# Altium PCB temperatureSensor.PcbDoc (part 2 of 3)
Units mm, origin at the board's own origin, x right, y up, seen from the top; angles counter-clockwise.
Board outline 80 x 46 mm, 2 copper layers (Top Layer, Bottom Layer); 50 components, 32 nets, 187 pads, 128 vias.
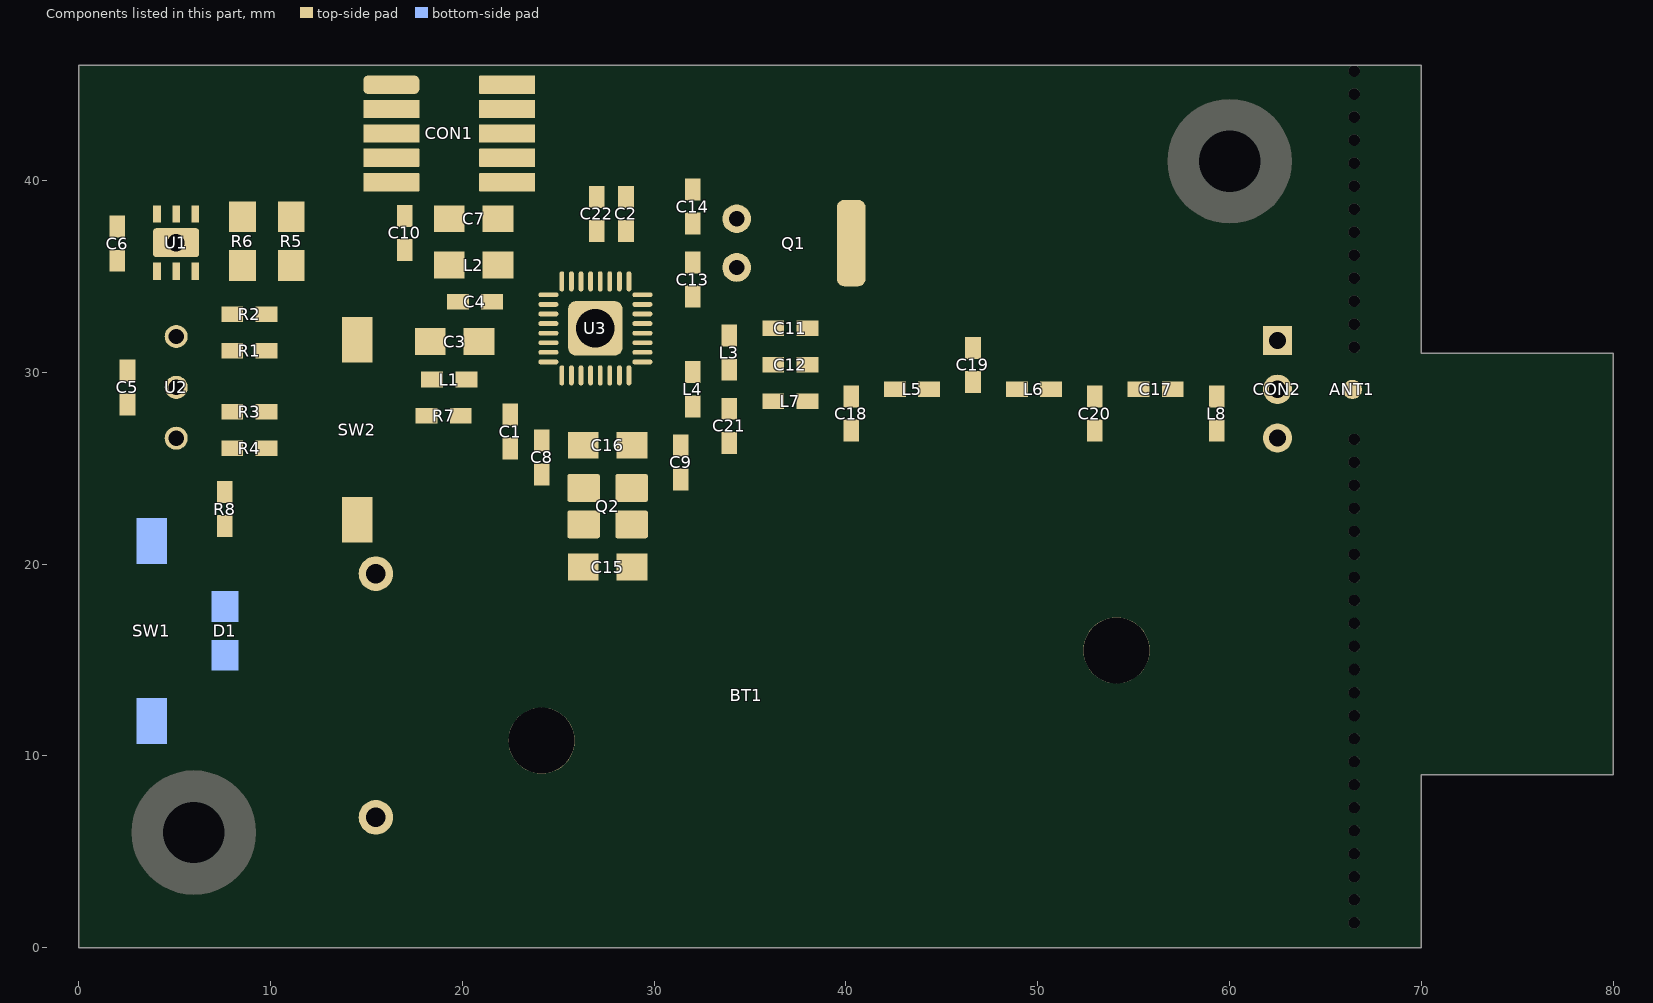
[diagram p2: the components of this part, seen from the top]

## Via types
v1: diameter 0.7, hole 0.3, Top Layer to Bottom Layer, tented both sides, 109 vias
v2: diameter 1, hole 0.38, Top Layer to Bottom Layer, tented both sides, 19 vias

## Nets (pads, with @x,y where several pads share a name; then routed paths per layer and width w, separated by ;. In a path a pad name is that pad's centre, name@x,y a point inside that pad or via, vN(x,y) a via of type N, cw(c..) or ccw(c..) an arc to the next point about the centre after c; other vN are vias at no path point) (continued)
copper on no net: (continued)
  Top Layer w0.025: 28.392,9.805 29.459,9.805 ; 28.392,9.831 29.459,9.831 ; 28.392,9.856 29.459,9.856 ; 28.392,9.881 29.459,9.881 ; 28.392,9.907 29.459,9.907 ; 28.392,9.932 29.459,9.932 ; 28.392,9.958 29.459,9.958 ; 28.392,9.983 29.459,9.983 ; 28.392,10.008 29.459,10.008 ; 28.392,10.034 29.459,10.034 ; 28.392,10.059 29.459,10.059 ; 28.392,10.085 29.459,10.085 ; 28.392,10.11 29.459,10.11 ; 28.392,10.135 29.459,10.135 ; 28.392,10.161 29.459,10.161 ; 28.392,10.186 29.459,10.186 ; 28.392,10.212 29.459,10.212 ; 28.392,10.237 29.459,10.237 ; 28.392,10.262 29.459,10.262 ; 28.392,10.288 29.459,10.288 ; 28.392,10.313 29.459,10.313 ; 28.392,10.339 29.459,10.339 ; 28.392,10.364 29.459,10.364 ; 28.392,10.389 29.459,10.389 ; 28.392,10.415 29.459,10.415 ; 28.392,10.44 29.459,10.44 ; 28.392,10.466 29.459,10.466 ; 28.392,10.491 29.459,10.491 ; 28.392,10.516 29.459,10.516 ; 28.392,10.542 29.459,10.542 ; 28.392,10.567 29.459,10.567 ; 28.392,10.593 29.459,10.593 ; 28.392,10.618 29.459,10.618 ; 28.392,10.643 29.459,10.643 ; 28.392,10.669 29.459,10.669 ; 28.392,10.694 29.459,10.694 ; 28.392,10.72 29.459,10.72 ; 28.392,10.745 29.459,10.745 ; 28.392,10.77 29.459,10.77 ; 28.392,10.796 29.459,10.796 ; 28.392,10.821 29.459,10.821 ; 28.392,10.847 29.459,10.847 ; 28.392,10.872 29.459,10.872 ; 28.392,10.897 29.459,10.897 ; 28.392,10.923 29.459,10.923 ; 28.392,10.948 29.459,10.948 ; 28.392,10.974 29.459,10.974 ; 28.392,10.999 29.459,10.999 ; 28.392,11.024 29.459,11.024 ; 28.392,11.05 29.459,11.05 ; 28.392,11.075 29.459,11.075 ; 28.392,11.101 29.459,11.101 ; 28.392,11.126 29.459,11.126 ; 28.392,11.151 29.459,11.151 ; 28.392,11.177 29.459,11.177 ; 28.392,11.202 29.459,11.202 ; 28.392,11.228 29.459,11.228 ; 28.392,11.253 29.459,11.253 ; 28.392,11.278 29.459,11.278 ; 28.392,11.304 29.459,11.304 ; 28.392,11.329 29.459,11.329 ; 28.392,11.355 29.434,11.355 ; 28.392,11.38 30.678,11.38 ; 28.392,11.405 30.653,11.405 ; 28.392,11.431 30.628,11.431 ; 28.392,11.456 30.602,11.456 ; 28.392,11.482 30.577,11.482 ; 28.392,11.507 30.551,11.507 ; 28.392,11.532 30.526,11.532 ; 28.392,11.558 30.526,11.558 ; 28.392,11.583 30.475,11.583 ; 28.392,11.609 30.45,11.609 ; 28.392,11.634 30.45,11.634 ; 28.392,11.659 30.424,11.659 ; 28.392,11.685 30.399,11.685 ; 28.392,11.71 30.374,11.71 ; 28.392,11.736 30.348,11.736 ; 28.392,11.761 30.348,11.761 ; 28.392,11.786 30.374,11.786 ; 28.392,11.812 30.399,11.812 ; 28.392,11.837 30.424,11.837 ; 28.392,11.863 30.45,11.863 ; 28.392,11.888 30.475,11.888 ; 28.392,11.913 30.501,11.913 ; 28.392,11.939 30.526,11.939 ; 28.392,11.964 30.577,11.964 ; 28.392,11.99 30.602,11.99 ; 28.392,12.015 30.628,12.015 ; 28.392,12.04 30.653,12.04 ; 28.392,12.066 30.678,12.066 ; 28.392,12.091 30.704,12.091 ; 28.392,12.117 30.729,12.117 ; 28.392,12.142 30.755,12.142 ; 28.392,12.167 30.78,12.167 ; 28.392,12.193 30.831,12.193 ; 28.392,12.218 29.459,12.218 ; 28.392,12.244 29.459,12.244 ; 28.392,12.269 29.459,12.269 ; 28.392,12.294 29.459,12.294 ; 28.392,12.32 29.459,12.32 ; 28.392,12.345 29.459,12.345 ; 28.392,12.371 29.459,12.371 ; 28.392,12.396 29.459,12.396 ; 28.392,12.421 29.459,12.421 ; 28.392,12.447 29.459,12.447 ; 28.392,12.472 29.459,12.472 ; 28.392,12.498 29.459,12.498 ; 28.392,12.523 29.459,12.523 ; 28.392,12.548 29.459,12.548 ; 28.392,12.574 29.459,12.574 ; 28.392,12.599 29.459,12.599 ; 28.392,12.625 29.459,12.625 ; 28.392,12.65 29.459,12.65 ; 28.392,12.675 29.459,12.675 ; 28.392,12.701 29.459,12.701 ; 28.392,12.726 29.459,12.726 ; 28.392,12.752 29.459,12.752 ; 28.392,12.777 29.459,12.777 ; 28.392,12.802 29.459,12.802 ; 28.392,12.828 29.459,12.828 ; 28.392,12.853 29.459,12.853 ; 28.392,12.879 29.459,12.879 ; 28.392,12.904 29.459,12.904 ; 28.392,12.929 29.459,12.929 ; 28.392,12.955 29.459,12.955 ; 28.392,12.98 29.459,12.98 ; 28.392,13.006 29.459,13.006 ; 28.392,13.031 29.459,13.031 ; 28.392,13.056 29.459,13.056 ; 28.392,13.082 29.459,13.082 ; 28.392,13.107 29.459,13.107 ; 28.392,13.133 29.459,13.133 ; 28.392,13.158 29.459,13.158 ; 28.392,13.183 29.459,13.183 ; 28.392,13.209 29.459,13.209 ; 28.392,13.234 29.459,13.234 ; 28.392,13.26 29.459,13.26 ; 28.392,13.285 29.459,13.285 ; 28.392,13.31 29.459,13.31 ; 28.392,13.336 29.459,13.336 ; 28.392,13.361 29.459,13.361 ; 28.392,13.387 29.459,13.387 ; 28.392,13.412 29.459,13.412 ; 28.392,13.437 29.459,13.437 ; 28.392,13.463 29.459,13.463 ; 28.392,13.488 29.459,13.488 ; 28.392,13.514 29.459,13.514 ; 28.392,13.539 29.459,13.539 ; 28.392,13.564 29.459,13.564 ; 28.392,13.59 29.459,13.59 ; 28.392,13.615 29.459,13.615 ; 28.392,13.641 29.459,13.641 ; 28.392,13.666 29.459,13.666 ; 28.392,13.691 29.459,13.691 ; 28.392,13.717 29.459,13.717 ; 28.392,13.742 29.459,13.742 ; 28.392,13.768 29.459,13.768 ; 28.392,13.793 29.459,13.793 ; 28.392,13.818 29.459,13.818 ; 28.392,13.844 29.459,13.844 ; 28.392,13.869 29.459,13.869 ; 28.392,13.895 29.459,13.895 ; 28.392,13.92 29.459,13.92 ; 28.392,13.945 29.459,13.945 ; 28.392,13.971 29.459,13.971 ; 28.392,13.996 29.459,13.996 ; 28.392,14.022 29.459,14.022 ; 28.392,14.047 29.459,14.047 ; 28.392,14.072 29.459,14.072 ; 28.392,14.098 29.459,14.098 ; 28.392,14.123 29.459,14.123 ; 28.392,14.149 29.459,14.149 ; 28.392,14.174 29.459,14.174 ; 28.392,14.199 29.459,14.199 ; 28.392,14.225 29.459,14.225 ; 28.392,14.25 29.459,14.25 ; 28.392,14.276 29.459,14.276 ; 28.392,14.301 29.459,14.301 ; 28.392,14.326 29.459,14.326 ; 28.392,14.352 29.459,14.352 ; 28.392,14.377 29.459,14.377 ; 28.392,14.403 29.459,14.403 ; 28.392,14.428 29.459,14.428 ; 28.392,14.453 29.459,14.453 ; 28.392,14.479 29.459,14.479 ; 28.392,14.504 29.459,14.504 ; 28.392,14.53 29.459,14.53 ; 28.392,14.555 29.434,14.555 ; 28.392,14.58 29.434,14.58 ; 28.392,14.606 29.434,14.606 ; 28.392,14.631 29.408,14.631 ; 28.392,14.657 29.408,14.657 ; 28.392,14.682 29.383,14.682 ; 28.392,14.707 29.383,14.707 ; 28.392,14.733 29.332,14.733 ; 28.392,14.758 29.332,14.758 ; 28.392,14.784 29.307,14.784 ; 28.392,14.809 29.281,14.809 ; 28.392,14.834 29.256,14.834 ; 28.392,14.86 29.231,14.86 ; 28.392,14.885 29.18,14.885 ; 28.392,14.911 29.129,14.911 ; 28.392,14.936 29.078,14.936 ; 28.392,14.961 28.951,14.961 ; 28.418,9.704 29.459,9.704 ; 28.418,9.729 29.459,9.729 ; 28.418,9.754 29.459,9.754 ; 28.418,9.78 29.459,9.78 ; 28.443,9.627 29.459,9.627 ; 28.443,9.653 29.459,9.653 ; 28.443,9.678 29.459,9.678 ; 28.469,9.577 29.459,9.577 ; 28.469,9.602 29.459,9.602 ; 28.494,9.551 29.459,9.551 ; 28.519,9.5 29.459,9.5 ; 28.519,9.526 29.459,9.526 ; 28.545,9.475 29.459,9.475 ; 28.57,9.45 29.459,9.45 ; 28.596,9.424 29.459,9.424 ; 28.646,9.399 29.459,9.399 ; 28.697,9.373 29.459,9.373 ; 28.748,9.348 29.459,9.348 ; 28.85,9.323 29.459,9.323 ; 29.459,11.355 30.704,11.355 ; 29.485,11.329 30.729,11.329 ; 29.51,11.278 30.755,11.278 ; 29.51,11.304 30.755,11.304 ; 29.51,12.218 30.856,12.218 ; 29.535,11.253 30.78,11.253 ; 29.535,12.244 30.882,12.244 ; 29.561,11.228 30.805,11.228 ; 29.561,12.269 30.907,12.269 ; 29.586,11.202 30.831,11.202 ; 29.586,12.294 30.932,12.294 ; 29.612,11.177 30.856,11.177 ; 29.612,12.32 30.958,12.32 ; 29.637,11.151 30.882,11.151 ; 29.662,11.101 30.932,11.101 ; 29.662,11.126 30.907,11.126 ; 29.662,12.345 30.983,12.345 ; 29.662,12.371 31.034,12.371 ; 29.688,11.075 30.958,11.075 ; 29.713,11.05 30.983,11.05 ; 29.713,12.396 31.059,12.396 ; 29.739,11.024 31.009,11.024 ; 29.739,12.421 31.085,12.421 ; 29.764,10.999 31.034,10.999 ; 29.764,12.447 31.11,12.447 ; 29.789,10.974 31.059,10.974 ; 29.789,12.472 31.136,12.472 ; 29.815,10.948 31.085,10.948 ; 29.815,12.498 31.161,12.498 ; 29.84,10.923 31.11,10.923 ; 29.84,12.523 31.186,12.523 ; 29.866,10.872 31.161,10.872 ; 29.866,10.897 31.136,10.897 ; 29.891,10.847 31.161,10.847 ; 29.891,12.548 31.212,12.548 ; 29.916,10.821 31.186,10.821 ; 29.916,12.574 31.263,12.574 ; 29.942,10.796 31.212,10.796 ; 29.942,12.599 31.263,12.599 ; 29.967,10.77 31.237,10.77 ; 29.967,12.625 31.313,12.625 ; 29.993,10.72 31.288,10.72 ; 29.993,10.745 31.263,10.745 ; 30.018,10.694 31.313,10.694 ; 30.018,12.65 31.339,12.65 ; 30.018,12.675 31.364,12.675 ; 30.043,10.669 31.339,10.669 ; 30.069,10.643 31.364,10.643 ; 30.069,12.701 31.39,12.701 ; 30.094,10.618 31.39,10.618 ; 30.094,12.726 31.415,12.726 ; 30.12,10.593 31.415,10.593 ; 30.12,12.752 31.44,12.752 ; 30.145,10.542 31.44,10.542 ; 30.145,10.567 31.415,10.567 ; 30.145,12.777 31.466,12.777 ; 30.17,10.516 31.466,10.516 ; 30.196,10.491 31.491,10.491 ; 30.196,12.802 31.517,12.802 ; 30.221,10.466 31.517,10.466 ; 30.221,12.828 31.542,12.828 ; 30.247,10.44 31.542,10.44 ; 30.247,12.853 31.567,12.853 ; 30.272,10.415 31.567,10.415 ; 30.272,12.879 31.593,12.879 ; 30.297,10.389 31.593,10.389 ; 30.297,12.904 31.618,12.904 ; 30.323,10.339 31.644,10.339 ; 30.323,10.364 31.618,10.364 ; 30.323,12.929 31.644,12.929 ; 30.348,10.313 31.669,10.313 ; 30.374,10.288 31.694,10.288 ; 30.374,12.955 31.669,12.955 ; 30.399,10.262 31.72,10.262 ; 30.399,12.98 31.694,12.98 ; 30.424,10.212 31.745,10.212 ; 30.424,10.237 31.72,10.237 ; 30.424,13.006 31.745,13.006 ; 30.45,10.186 31.796,10.186 ; 30.45,13.031 31.771,13.031 ; 30.475,10.161 31.796,10.161 ; 30.475,13.056 31.796,13.056 ; 30.501,10.135 31.821,10.135 ; 30.501,13.082 31.821,13.082 ; 30.526,10.085 31.872,10.085 ; 30.526,10.11 31.847,10.11 ; 30.526,13.107 31.847,13.107 ; 30.551,10.059 31.898,10.059 ; 30.577,10.034 31.923,10.034 ; 30.577,13.133 31.872,13.133 ; 30.602,10.008 31.948,10.008 ; 30.602,13.158 31.898,13.158 ; 30.628,9.983 31.974,9.983 ; 30.628,13.183 31.923,13.183 ; 30.653,9.932 32.025,9.932 ; 30.653,9.958 31.999,9.958 ; 30.653,13.209 31.948,13.209 ; 30.678,9.907 32.025,9.907 ; 30.678,13.234 31.999,13.234 ; 30.704,9.881 32.05,9.881 ; 30.704,13.26 32.025,13.26 ; 30.729,9.856 32.101,9.856 ; 30.729,13.285 32.05,13.285 ; 30.755,9.831 32.126,9.831 ; 30.755,13.31 32.075,13.31 ; 30.78,9.805 32.126,9.805 ; 30.805,9.78 32.152,9.78 ; 30.805,13.336 32.101,13.336 ; 30.831,9.754 32.177,9.754 ; 30.831,13.361 32.126,13.361 ; 30.856,9.729 32.202,9.729 ; 30.882,9.704 32.228,9.704 ; 30.882,13.387 32.152,13.387 ; 30.907,9.678 32.253,9.678 ; 30.907,13.412 32.177,13.412 ; 30.932,9.653 32.279,9.653 ; 30.958,9.627 32.304,9.627 ; 30.958,13.437 32.228,13.437 ; 30.983,9.602 32.304,9.602 ; 30.983,13.463 32.253,13.463 ; 31.009,9.577 32.304,9.577 ; 31.034,13.488 32.253,13.488 ; 31.059,9.551 32.304,9.551 ; 31.085,9.526 32.279,9.526 ; 31.085,13.514 32.202,13.514 ; 31.11,9.5 32.279,9.5 ; 31.136,13.539 32.152,13.539 ; 31.161,9.475 32.228,9.475 ; 31.186,9.45 32.202,9.45 ; 31.212,13.564 32.101,13.564 ; 31.237,9.424 32.177,9.424 ; 31.288,9.399 32.152,9.399 ; 31.288,13.59 32.05,13.59 ; 31.339,9.373 32.101,9.373 ; 31.39,9.348 32.05,9.348 ; 31.39,13.615 31.974,13.615 ; 31.491,9.323 31.948,9.323 ; 31.517,13.641 31.847,13.641 ; 32.38,9.323 33.218,9.323 ; 32.38,9.348 33.218,9.348 ; 32.38,9.373 33.218,9.373 ; 32.38,9.399 33.218,9.399 ; 32.38,9.424 33.218,9.424 ; 32.38,9.45 33.218,9.45 ; 32.38,9.475 33.218,9.475 ; 32.38,9.5 33.218,9.5 ; 32.38,9.526 33.218,9.526 ; 32.38,9.551 33.218,9.551 ; 32.38,9.577 33.218,9.577 ; 32.38,9.602 33.218,9.602 ; 32.38,9.627 33.218,9.627 ; 32.38,9.653 33.218,9.653 ; 32.38,9.678 33.218,9.678 ; 32.38,9.704 33.218,9.704 ; 32.38,9.729 33.218,9.729 ; 32.38,9.754 33.218,9.754 ; 32.38,9.78 33.218,9.78 ; 32.38,9.805 33.218,9.805 ; 32.38,9.831 33.218,9.831 ; 32.38,9.856 33.218,9.856 ; 32.38,9.881 33.218,9.881 ; 32.38,9.907 33.218,9.907 ; 32.38,9.932 33.218,9.932 ; 32.38,9.958 33.218,9.958 ; 32.38,9.983 33.218,9.983 ; 32.38,10.008 33.218,10.008 ; 32.38,10.034 33.218,10.034 ; 32.38,10.059 33.218,10.059 ; 32.38,10.085 33.218,10.085 ; 32.38,10.11 33.218,10.11 ; 32.38,10.135 33.218,10.135 ; 32.38,10.161 33.218,10.161 ; 32.38,10.186 33.218,10.186 ; 32.38,10.212 33.218,10.212 ; 32.38,10.237 33.218,10.237 ; 32.38,10.262 33.218,10.262 ; 32.38,10.288 33.218,10.288 ; 32.38,10.313 33.218,10.313 ; 32.38,10.339 33.218,10.339 ; 32.38,10.364 33.218,10.364 ; 32.38,10.389 33.218,10.389 ; 32.38,10.415 33.218,10.415 ; 32.38,10.44 33.218,10.44 ; 32.38,10.466 33.218,10.466 ; 32.38,10.491 33.218,10.491 ; 32.38,10.516 33.218,10.516 ; 32.38,10.542 33.218,10.542 ; 32.38,10.567 33.218,10.567 ; 32.38,10.593 33.218,10.593 ; 32.38,10.618 33.218,10.618 ; 32.38,10.643 33.218,10.643 ; 32.38,10.669 33.218,10.669 ; 32.38,10.694 33.218,10.694 ; 32.38,10.72 33.218,10.72 ; 32.38,10.745 33.218,10.745 ; 32.38,10.77 33.218,10.77 ; 32.38,10.796 33.218,10.796 ; 32.38,10.821 33.218,10.821 ; 32.38,10.847 33.218,10.847 ; 32.38,10.872 33.218,10.872 ; 32.38,10.897 33.218,10.897 ; 32.38,10.923 33.218,10.923 ; 32.38,10.948 33.218,10.948 ; 32.38,10.974 33.218,10.974 ; 32.38,10.999 33.218,10.999 ; 32.38,11.024 33.218,11.024 ; 32.38,11.05 33.193,11.05 ; 32.38,11.075 36.724,11.075 ; 32.38,11.101 36.724,11.101 ; 32.38,11.126 36.724,11.126 ; 32.38,11.151 36.724,11.151 ; 32.38,11.177 36.724,11.177 ; 32.38,11.202 36.724,11.202 ; 32.38,11.228 36.724,11.228 ; 32.38,11.253 36.724,11.253 ; 32.38,11.278 36.724,11.278 ; 32.38,11.304 36.724,11.304 ; 32.38,11.329 36.724,11.329 ; 32.38,11.355 36.724,11.355 ; 32.38,11.38 36.724,11.38 ; 32.38,11.405 36.724,11.405 ; 32.38,11.431 36.724,11.431 ; 32.38,11.456 36.724,11.456 ; 32.38,11.482 36.724,11.482 ; 32.38,11.507 36.724,11.507 ; 32.38,11.532 36.724,11.532 ; 32.38,11.558 36.724,11.558 ; 32.38,11.583 36.724,11.583 ; 32.38,11.609 36.724,11.609 ; 32.38,11.634 36.724,11.634 ; 32.38,11.659 36.724,11.659 ; 32.38,11.685 36.724,11.685 ; 32.38,11.71 36.724,11.71 ; 32.38,11.736 36.724,11.736 ; 32.38,11.761 36.724,11.761 ; 32.38,11.786 36.724,11.786 ; 32.38,11.812 36.724,11.812 ; 32.38,11.837 36.724,11.837 ; 32.38,11.863 36.724,11.863 ; 32.38,11.888 36.724,11.888 ; 32.38,11.913 33.218,11.913 ; 32.38,11.939 33.218,11.939 ; 32.38,11.964 33.218,11.964 ; 32.38,11.99 33.218,11.99 ; 32.38,12.015 33.218,12.015 ; 32.38,12.04 33.218,12.04 ; 32.38,12.066 33.218,12.066 ; 32.38,12.091 33.218,12.091 ; 32.38,12.117 33.218,12.117 ; 32.38,12.142 33.218,12.142 ; 32.38,12.167 33.218,12.167 ; 32.38,12.193 33.218,12.193 ; 32.38,12.218 33.218,12.218 ; 32.38,12.244 33.218,12.244 ; 32.38,12.269 33.218,12.269 ; 32.38,12.294 33.218,12.294 ; 32.38,12.32 33.218,12.32 ; 32.38,12.345 33.218,12.345 ; 32.38,12.371 33.218,12.371 ; 32.38,12.396 33.218,12.396 ; 32.38,12.421 33.218,12.421 ; 32.38,12.447 33.218,12.447 ; 32.38,12.472 33.218,12.472 ; 32.38,12.498 33.218,12.498 ; 32.38,12.523 33.218,12.523 ; 32.38,12.548 33.218,12.548 ; 32.38,12.574 33.218,12.574 ; 32.38,12.599 33.218,12.599 ; 32.38,12.625 33.218,12.625 ; 32.38,12.65 33.218,12.65 ; 32.38,12.675 33.218,12.675 ; 32.38,12.701 33.218,12.701 ; 32.38,12.726 33.218,12.726 ; 32.38,12.752 33.218,12.752 ; 32.38,12.777 33.218,12.777 ; 32.38,12.802 33.218,12.802 ; 32.38,12.828 33.218,12.828 ; 32.38,12.853 33.218,12.853 ; 32.38,12.879 33.218,12.879 ; 32.38,12.904 33.218,12.904 ; 32.38,12.929 33.218,12.929 ; 32.38,12.955 33.218,12.955 ; 32.38,12.98 33.218,12.98 ; 32.38,13.006 33.218,13.006 ; 32.38,13.031 33.218,13.031 ; 32.38,13.056 33.218,13.056 ; 32.38,13.082 33.218,13.082 ; 32.38,13.107 33.218,13.107 ; 32.38,13.133 33.218,13.133 ; 32.38,13.158 33.218,13.158 ; 32.38,13.183 33.218,13.183 ; 32.38,13.209 33.218,13.209 ; 32.38,13.234 33.218,13.234 ; 32.38,13.26 33.218,13.26 ; 32.38,13.285 33.218,13.285 ; 32.38,13.31 33.218,13.31 ; 32.38,13.336 33.218,13.336 ; 32.38,13.361 33.218,13.361 ; 32.38,13.387 33.218,13.387 ; 32.38,13.412 33.218,13.412 ; 32.38,13.437 33.218,13.437 ; 32.38,13.463 33.218,13.463 ; 32.38,13.488 33.218,13.488 ; 32.38,13.514 33.218,13.514 ; 32.38,13.539 33.218,13.539 ; 32.38,13.564 33.218,13.564 ; 32.38,13.59 33.218,13.59 ; 32.38,13.615 33.218,13.615 ; 32.38,13.641 33.218,13.641 ; 35.885,9.323 36.724,9.323 ; 35.885,9.348 36.724,9.348 ; 35.885,9.373 36.724,9.373 ; 35.885,9.399 36.724,9.399 ; 35.885,9.424 36.724,9.424 ; 35.885,9.45 36.724,9.45 ; 35.885,9.475 36.724,9.475 ; 35.885,9.5 36.724,9.5 ; 35.885,9.526 36.724,9.526 ; 35.885,9.551 36.724,9.551 ; 35.885,9.577 36.724,9.577 ; 35.885,9.602 36.724,9.602 ; 35.885,9.627 36.724,9.627 ; 35.885,9.653 36.724,9.653 ; 35.885,9.678 36.724,9.678 ; 35.885,9.704 36.724,9.704 ; 35.885,9.729 36.724,9.729 ; 35.885,9.754 36.724,9.754 ; 35.885,9.78 36.724,9.78 ; 35.885,9.805 36.724,9.805 ; 35.885,9.831 36.724,9.831 ; 35.885,9.856 36.724,9.856 ; 35.885,9.881 36.724,9.881 ; 35.885,9.907 36.724,9.907 ; 35.885,9.932 36.724,9.932 ; 35.885,9.958 36.724,9.958 ; 35.885,9.983 36.724,9.983 ; 35.885,10.008 36.724,10.008 ; 35.885,10.034 36.724,10.034 ; 35.885,10.059 36.724,10.059 ; 35.885,10.085 36.724,10.085 ; 35.885,10.11 36.724,10.11 ; 35.885,10.135 36.724,10.135 ; 35.885,10.161 36.724,10.161 ; 35.885,10.186 36.724,10.186 ; 35.885,10.212 36.724,10.212 ; 35.885,10.237 36.724,10.237 ; 35.885,10.262 36.724,10.262 ; 35.885,10.288 36.724,10.288 ; 35.885,10.313 36.724,10.313 ; 35.885,10.339 36.724,10.339 ; 35.885,10.364 36.724,10.364 ; 35.885,10.389 36.724,10.389 ; 35.885,10.415 36.724,10.415 ; 35.885,10.44 36.724,10.44 ; 35.885,10.466 36.724,10.466 ; 35.885,10.491 36.724,10.491 ; 35.885,10.516 36.724,10.516 ; 35.885,10.542 36.724,10.542 ; 35.885,10.567 36.724,10.567 ; 35.885,10.593 36.724,10.593 ; 35.885,10.618 36.724,10.618 ; 35.885,10.643 36.724,10.643 ; 35.885,10.669 36.724,10.669 ; 35.885,10.694 36.724,10.694 ; 35.885,10.72 36.724,10.72 ; 35.885,10.745 36.724,10.745 ; 35.885,10.77 36.724,10.77 ; 35.885,10.796 36.724,10.796 ; 35.885,10.821 36.724,10.821 ; 35.885,10.847 36.724,10.847 ; 35.885,10.872 36.724,10.872 ; 35.885,10.897 36.724,10.897 ; 35.885,10.923 36.724,10.923 ; 35.885,10.948 36.724,10.948 ; 35.885,10.974 36.724,10.974 ; 35.885,10.999 36.724,10.999 ; 35.885,11.024 36.724,11.024 ; 35.885,11.05 36.724,11.05 ; 35.885,11.913 36.724,11.913 ; 35.885,11.939 36.724,11.939 ; 35.885,11.964 36.724,11.964 ; 35.885,11.99 36.724,11.99 ; 35.885,12.015 36.724,12.015 ; 35.885,12.04 36.724,12.04 ; 35.885,12.066 36.724,12.066 ; 35.885,12.091 36.724,12.091 ; 35.885,12.117 36.724,12.117 ; 35.885,12.142 36.724,12.142 ; 35.885,12.167 36.724,12.167 ; 35.885,12.193 36.724,12.193 ; 35.885,12.218 36.724,12.218 ; 35.885,12.244 36.724,12.244 ; 35.885,12.269 36.724,12.269 ; 35.885,12.294 36.724,12.294 ; 35.885,12.32 36.724,12.32 ; 35.885,12.345 36.724,12.345 ; 35.885,12.371 36.724,12.371 ; 35.885,12.396 36.724,12.396 ; 35.885,12.421 36.724,12.421 ; 35.885,12.447 36.724,12.447 ; 35.885,12.472 36.724,12.472 ; 35.885,12.498 36.724,12.498 ; 35.885,12.523 36.724,12.523 ; 35.885,12.548 36.724,12.548 ; 35.885,12.574 36.724,12.574 ; 35.885,12.599 36.724,12.599 ; 35.885,12.625 36.724,12.625 ; 35.885,12.65 36.724,12.65 ; 35.885,12.675 36.724,12.675 ; 35.885,12.701 36.724,12.701 ; 35.885,12.726 36.724,12.726 ; 35.885,12.752 36.724,12.752 ; 35.885,12.777 36.724,12.777 ; 35.885,12.802 36.724,12.802 ; 35.885,12.828 36.724,12.828 ; 35.885,12.853 36.724,12.853 ; 35.885,12.879 36.724,12.879 ; 35.885,12.904 36.724,12.904 ; 35.885,12.929 36.724,12.929 ; 35.885,12.955 36.724,12.955 ; 35.885,12.98 36.724,12.98 ; 35.885,13.006 36.724,13.006 ; 35.885,13.031 36.724,13.031 ; 35.885,13.056 36.724,13.056 ; 35.885,13.082 36.724,13.082 ; 35.885,13.107 36.724,13.107 ; 35.885,13.133 36.724,13.133 ; 35.885,13.158 36.724,13.158 ; 35.885,13.183 36.724,13.183 ; 35.885,13.209 36.724,13.209 ; 35.885,13.234 36.724,13.234 ; 35.885,13.26 36.724,13.26 ; 35.885,13.285 36.724,13.285 ; 35.885,13.31 36.724,13.31 ; 35.885,13.336 36.724,13.336 ; 35.885,13.361 36.724,13.361 ; 35.885,13.387 36.724,13.387 ; 35.885,13.412 36.724,13.412 ; 35.885,13.437 36.724,13.437 ; 35.885,13.463 36.724,13.463 ; 35.885,13.488 36.724,13.488 ; 35.885,13.514 36.724,13.514 ; 35.885,13.539 36.724,13.539 ; 35.885,13.564 36.724,13.564 ; 35.885,13.59 36.724,13.59 ; 35.885,13.615 36.724,13.615 ; 35.885,13.641 36.724,13.641 ; 36.825,10.948 37.663,10.948 ; 36.825,10.974 37.663,10.974 ; 36.825,10.999 37.663,10.999 ; 36.825,11.024 37.663,11.024 ; 36.825,11.05 37.663,11.05 ; 36.825,11.075 37.663,11.075 ; 36.825,11.101 37.663,11.101 ; 36.825,11.126 37.663,11.126 ; 36.825,11.151 37.663,11.151 ; 36.825,11.177 37.663,11.177 ; 36.825,11.202 37.663,11.202 ; 36.825,11.228 37.663,11.228 ; 36.825,11.253 37.663,11.253 ; 36.825,11.278 37.663,11.278 ; 36.825,11.304 37.663,11.304 ; 36.825,11.329 37.663,11.329 ; 36.825,11.355 37.663,11.355 ; 36.825,11.38 37.663,11.38 ; 36.825,11.405 37.663,11.405 ; 36.825,11.431 37.663,11.431 ; 36.825,11.456 37.663,11.456 ; 36.825,11.482 37.663,11.482 ; 36.825,11.507 37.663,11.507 ; 36.825,11.532 37.663,11.532 ; 36.825,11.558 37.663,11.558 ; 36.825,11.583 37.663,11.583 ; 36.825,11.609 37.663,11.609 ; 36.825,11.634 37.663,11.634 ; 36.825,11.659 37.663,11.659 ; 36.825,11.685 37.663,11.685 ; 36.825,11.71 37.663,11.71 ; 36.825,11.736 37.663,11.736 ; 36.825,11.761 37.663,11.761 ; 36.825,11.786 37.663,11.786 ; 36.825,11.812 37.663,11.812 ; 36.825,11.837 37.663,11.837 ; 36.825,11.863 37.663,11.863 ; 36.825,11.888 37.663,11.888 ; 36.825,11.913 37.663,11.913 ; 36.825,11.939 37.663,11.939 ; 36.825,11.964 37.663,11.964 ; 36.825,11.99 37.663,11.99 ; 36.825,12.015 37.663,12.015 ; 36.851,10.72 37.714,10.72 ; 36.851,10.745 37.714,10.745 ; 36.851,10.77 37.689,10.77 ; 36.851,10.796 37.689,10.796 ; 36.851,10.821 37.689,10.821 ; 36.851,10.847 37.689,10.847 ; 36.851,10.872 37.689,10.872 ; 36.851,10.897 37.663,10.897 ; 36.851,10.923 37.663,10.923 ; 36.851,12.04 37.663,12.04 ; 36.851,12.066 37.689,12.066 ; 36.851,12.091 37.689,12.091 ; 36.851,12.117 37.689,12.117 ; 36.851,12.142 37.689,12.142 ; 36.851,12.167 37.689,12.167 ; 36.851,12.193 37.714,12.193 ; 36.851,12.218 37.714,12.218 ; 36.851,12.244 37.714,12.244 ; 36.876,10.593 37.765,10.593 ; 36.876,10.618 37.765,10.618 ; 36.876,10.643 37.74,10.643 ; 36.876,10.669 37.74,10.669 ; 36.876,10.694 37.714,10.694 ; 36.876,12.269 37.74,12.269 ; 36.876,12.294 37.74,12.294 ; 36.876,12.32 37.74,12.32 ; 36.876,12.345 37.765,12.345 ; 36.901,10.516 37.816,10.516 ; 36.901,10.542 37.79,10.542 ; 36.901,10.567 37.765,10.567 ; 36.901,12.371 37.765,12.371 ; 36.901,12.396 37.79,12.396 ; 36.901,12.421 37.79,12.421 ; 36.901,12.447 37.816,12.447 ; 36.927,10.44 37.867,10.44 ; 36.927,10.466 37.841,10.466 ; 36.927,10.491 37.816,10.491 ; 36.927,12.472 37.841,12.472 ; 36.927,12.498 37.841,12.498 ; 36.927,12.523 37.867,12.523 ; 36.952,10.364 37.917,10.364 ; 36.952,10.389 37.892,10.389 ; 36.952,10.415 37.867,10.415 ; 36.952,12.548 37.892,12.548 ; 36.952,12.574 37.892,12.574 ; 36.952,12.599 37.917,12.599 ; 36.978,10.288 37.994,10.288 ; 36.978,10.313 37.968,10.313 ; 36.978,10.339 37.943,10.339 ; 36.978,12.625 37.943,12.625 ; 36.978,12.65 37.994,12.65 ; 37.003,10.237 38.07,10.237 ; 37.003,10.262 38.044,10.262 ; 37.003,12.675 38.019,12.675 ; 37.003,12.701 38.044,12.701 ; 37.028,10.186 38.146,10.186 ; 37.028,10.212 38.121,10.212 ; 37.028,12.726 38.095,12.726 ; 37.028,12.752 38.121,12.752 ; 37.054,10.135 38.273,10.135 ; 37.054,10.161 38.197,10.161 ; 37.054,12.777 38.171,12.777 ; 37.054,12.802 38.222,12.802 ; 37.079,10.11 38.349,10.11 ; 37.079,12.828 38.298,12.828 ; 37.079,12.853 38.4,12.853 ; 37.105,10.059 41.27,10.059 ; 37.105,10.085 38.476,10.085 ; 37.105,12.879 38.578,12.879 ; 37.13,10.008 41.219,10.008 ; 37.13,10.034 41.245,10.034 ; 37.13,12.904 41.245,12.904 ; 37.13,12.929 41.245,12.929 ; 37.155,9.983 41.219,9.983 ; 37.155,12.955 41.219,12.955 ; 37.181,9.958 41.194,9.958 ; 37.181,12.98 41.194,12.98 ; 37.181,13.006 41.169,13.006 ; 37.206,9.907 41.143,9.907 ; 37.206,9.932 41.169,9.932 ; 37.206,13.031 41.169,13.031 ; 37.232,9.881 41.143,9.881 ; 37.232,13.056 41.143,13.056 ; 37.257,9.856 41.118,9.856 ; 37.257,13.082 41.118,13.082 ; 37.257,13.107 41.092,13.107 ; 37.282,9.831 41.092,9.831 ; 37.282,13.133 41.067,13.133 ; 37.308,9.805 41.067,9.805 ; 37.308,13.158 41.042,13.158 ; 37.333,9.78 41.042,9.78 ; 37.333,13.183 41.042,13.183 ; 37.359,9.754 41.016,9.754 ; 37.359,13.209 41.016,13.209 ; 37.384,9.729 40.991,9.729 ; 37.384,13.234 40.965,13.234 ; 37.409,9.704 40.965,9.704 ; 37.409,13.26 40.94,13.26 ; 37.435,9.678 40.94,9.678 ; 37.46,9.653 40.915,9.653 ; 37.46,13.285 40.915,13.285 ; 37.486,9.627 40.864,9.627 ; 37.486,13.31 40.889,13.31 ; 37.511,13.336 40.864,13.336 ; 37.536,9.602 40.838,9.602 ; 37.536,13.361 40.813,13.361 ; 37.562,9.577 40.813,9.577 ; 37.587,9.551 40.762,9.551 ; 37.587,13.387 40.788,13.387 ; 37.613,13.412 40.737,13.412 ; 37.638,9.526 40.737,9.526 ; 37.663,9.5 40.686,9.5 ; 37.663,13.437 40.711,13.437 ; 37.714,9.475 40.661,9.475 ; 37.714,13.463 40.661,13.463 ; 37.74,13.488 40.61,13.488 ; 37.765,9.45 40.61,9.45 ; 37.79,13.514 40.584,13.514 ; 37.816,9.424 40.559,9.424 ; 37.841,13.539 40.508,13.539 ; 37.867,9.399 40.508,9.399 ; 37.917,13.564 40.457,13.564 ; 37.943,9.373 40.432,9.373 ; 37.968,13.59 40.407,13.59 ; 37.994,9.348 40.381,9.348 ; 38.044,13.615 40.33,13.615 ; 38.07,9.323 40.305,9.323 ; 38.121,13.641 40.254,13.641 ; 38.171,9.297 40.203,9.297 ; 38.222,13.666 40.153,13.666 ; 38.273,9.272 40.102,9.272 ; 38.375,13.691 40,13.691 ; 38.476,9.246 39.899,9.246 ; 39.797,12.879 41.27,12.879 ; 39.899,10.085 41.27,10.085 ; 39.975,12.853 41.296,12.853 ; 40.026,10.11 41.296,10.11 ; 40.076,12.828 41.296,12.828 ; 40.102,10.135 41.296,10.135 ; 40.127,12.802 41.321,12.802 ; 40.153,10.161 41.321,10.161 ; 40.203,10.186 41.321,10.186 ; 40.203,12.777 41.321,12.777 ; 40.254,10.212 41.346,10.212 ; 40.254,12.752 41.346,12.752 ; 40.28,12.726 41.346,12.726 ; 40.305,10.237 41.346,10.237 ; 40.33,10.262 41.372,10.262 ; 40.33,12.701 41.372,12.701 ; 40.356,10.288 41.372,10.288 ; 40.356,12.675 41.372,12.675 ; 40.381,10.313 41.397,10.313 ; 40.381,12.65 41.372,12.65 ; 40.407,12.625 41.397,12.625 ; 40.432,10.339 41.397,10.339 ; 40.432,12.599 41.397,12.599 ; 40.457,10.364 41.397,10.364 ; 40.457,10.389 41.423,10.389 ; 40.457,12.574 41.423,12.574 ; 40.483,10.415 41.423,10.415 ; 40.483,12.548 41.423,12.548 ; 40.508,10.44 41.448,10.44 ; 40.508,12.523 41.423,12.523 ; 40.534,10.466 41.448,10.466 ; 40.534,10.491 41.448,10.491 ; 40.534,12.472 41.448,12.472 ; 40.534,12.498 41.448,12.498 ; 40.559,10.516 41.448,10.516 ; 40.559,12.421 41.473,12.421 ; 40.559,12.447 41.448,12.447 ; 40.584,10.542 41.473,10.542 ; 40.584,10.567 41.473,10.567 ; 40.584,12.371 41.473,12.371 ; 40.584,12.396 41.473,12.396 ; 40.61,10.593 41.473,10.593 ; 40.61,10.618 41.499,10.618 ; 40.61,12.32 41.499,12.32 ; 40.61,12.345 41.473,12.345 ; 40.635,10.643 41.499,10.643 ; 40.635,10.669 41.499,10.669 ; 40.635,10.694 41.499,10.694 ; 40.635,12.269 41.499,12.269 ; 40.635,12.294 41.499,12.294 ; 40.661,10.72 41.499,10.72 ; 40.661,10.745 41.499,10.745 ; 40.661,10.77 41.524,10.77 ; 40.661,10.796 41.524,10.796 ; 40.661,12.167 41.524,12.167 ; 40.661,12.193 41.524,12.193 ; 40.661,12.218 41.499,12.218 ; 40.661,12.244 41.499,12.244 ; 40.686,10.821 41.524,10.821 ; 40.686,10.847 41.524,10.847 ; 40.686,10.872 41.524,10.872 ; 40.686,10.897 41.524,10.897 ; 40.686,10.923 41.524,10.923 ; 40.686,10.948 41.524,10.948 ; 40.686,10.974 41.524,10.974 ; 40.686,11.99 41.524,11.99 ; 40.686,12.015 41.524,12.015 ; 40.686,12.04 41.524,12.04 ; 40.686,12.066 41.524,12.066 ; 40.686,12.091 41.524,12.091 ; 40.686,12.117 41.524,12.117 ; 40.686,12.142 41.524,12.142 ; 40.711,10.999 41.524,10.999 ; 40.711,11.024 41.524,11.024 ; 40.711,11.05 41.524,11.05 ; 40.711,11.075 41.524,11.075 ; 40.711,11.101 41.524,11.101 ; 40.711,11.126 41.524,11.126 ; 40.711,11.151 41.524,11.151 ; 40.711,11.177 41.524,11.177 ; 40.711,11.202 41.524,11.202 ; 40.711,11.228 41.524,11.228 ; 40.711,11.253 41.524,11.253 ; 40.711,11.278 41.524,11.278 ; 40.711,11.304 41.524,11.304 ; 40.711,11.329 41.524,11.329 ; 40.711,11.355 41.524,11.355 ; 40.711,11.38 41.524,11.38 ; 40.711,11.405 41.524,11.405 ; 40.711,11.431 41.524,11.431 ; 40.711,11.456 41.524,11.456 ; 40.711,11.482 41.524,11.482 ; 40.711,11.507 41.524,11.507 ; 40.711,11.532 41.524,11.532 ; 40.711,11.558 41.524,11.558 ; 40.711,11.583 41.524,11.583 ; 40.711,11.609 41.524,11.609 ; 40.711,11.634 41.524,11.634 ; 40.711,11.659 41.524,11.659 ; 40.711,11.685 41.524,11.685 ; 40.711,11.71 41.524,11.71 ; 40.711,11.736 41.524,11.736 ; 40.711,11.761 41.524,11.761 ; 40.711,11.786 41.524,11.786 ; 40.711,11.812 41.524,11.812 ; 40.711,11.837 41.524,11.837 ; 40.711,11.863 41.524,11.863 ; 40.711,11.888 41.524,11.888 ; 40.711,11.913 41.524,11.913 ; 40.711,11.939 41.524,11.939 ; 40.711,11.964 41.524,11.964 ; 41.626,9.323 42.464,9.323 ; 41.626,9.348 42.464,9.348 ; 41.626,9.373 42.464,9.373 ; 41.626,9.399 42.464,9.399 ; 41.626,9.424 42.464,9.424 ; 41.626,9.45 42.464,9.45 ; 41.626,9.475 42.464,9.475 ; 41.626,9.5 42.464,9.5 ; 41.626,9.526 42.464,9.526 ; 41.626,9.551 42.464,9.551 ; 41.626,9.577 42.464,9.577 ; 41.626,9.602 42.464,9.602 ; 41.626,9.627 42.464,9.627 ; 41.626,9.653 42.464,9.653 ; 41.626,9.678 42.464,9.678 ; 41.626,9.704 42.464,9.704 ; 41.626,9.729 42.464,9.729 ; 41.626,9.754 42.464,9.754 ; 41.626,9.78 42.464,9.78 ; 41.626,9.805 42.464,9.805 ; 41.626,9.831 42.464,9.831 ; 41.626,9.856 42.464,9.856 ; 41.626,9.881 42.464,9.881 ; 41.626,9.907 42.464,9.907 ; 41.626,9.932 42.464,9.932 ; 41.626,9.958 42.464,9.958 ; 41.626,9.983 42.464,9.983 ; 41.626,10.008 42.464,10.008 ; 41.626,10.034 42.464,10.034 ; 41.626,10.059 42.464,10.059 ; 41.626,10.085 42.464,10.085 ; 41.626,10.11 42.464,10.11 ; 41.626,10.135 42.464,10.135 ; 41.626,10.161 42.464,10.161 ; 41.626,10.186 42.464,10.186 ; 41.626,10.212 42.464,10.212 ; 41.626,10.237 42.464,10.237 ; 41.626,10.262 42.464,10.262 ; 41.626,10.288 42.464,10.288 ; 41.626,10.313 42.464,10.313 ; 41.626,10.339 42.464,10.339 ; 41.626,10.364 42.464,10.364 ; 41.626,10.389 42.464,10.389 ; 41.626,10.415 42.464,10.415 ; 41.626,10.44 42.464,10.44 ; 41.626,10.466 42.464,10.466 ; 41.626,10.491 42.464,10.491 ; 41.626,10.516 42.464,10.516 ; 41.626,10.542 42.464,10.542 ; 41.626,10.567 42.464,10.567 ; 41.626,10.593 42.464,10.593 ; 41.626,10.618 42.464,10.618 ; 41.626,10.643 42.464,10.643 ; 41.626,10.669 42.464,10.669 ; 41.626,10.694 42.464,10.694 ; 41.626,10.72 42.464,10.72 ; 41.626,10.745 42.464,10.745 ; 41.626,10.77 42.464,10.77 ; 41.626,10.796 42.464,10.796 ; 41.626,10.821 42.464,10.821 ; 41.626,10.847 42.464,10.847 ; 41.626,10.872 42.464,10.872 ; 41.626,10.897 42.464,10.897 ; 41.626,10.923 42.464,10.923 ; 41.626,10.948 42.464,10.948 ; 41.626,10.974 42.464,10.974 ; 41.626,10.999 42.464,10.999 ; 41.626,11.024 42.464,11.024 ; 41.626,11.05 42.464,11.05 ; 41.626,11.075 42.464,11.075 ; 41.626,11.101 42.464,11.101 ; 41.626,11.126 42.464,11.126 ; 41.626,11.151 42.464,11.151 ; 41.626,11.177 42.464,11.177 ; 41.626,11.202 42.464,11.202 ; 41.626,11.228 42.464,11.228 ; 41.626,11.253 42.464,11.253 ; 41.626,11.278 42.464,11.278 ; 41.626,11.304 42.464,11.304 ; 41.626,11.329 42.464,11.329 ; 41.626,11.355 42.464,11.355 ; 41.626,11.38 42.464,11.38 ; 41.626,11.405 42.464,11.405 ; 41.626,11.431 42.464,11.431 ; 41.626,11.456 42.464,11.456 ; 41.626,11.482 42.464,11.482 ; 41.626,11.507 42.464,11.507 ; 41.626,11.532 42.464,11.532 ; 41.626,11.558 42.464,11.558 ; 41.626,11.583 42.464,11.583 ; 41.626,11.609 42.464,11.609 ; 41.626,11.634 42.464,11.634 ; 41.626,11.659 42.464,11.659 ; 41.626,11.685 42.464,11.685 ; 41.626,11.71 42.464,11.71 ; 41.626,11.736 42.464,11.736 ; 41.626,11.761 42.464,11.761 ; 41.626,11.786 43.404,11.786 ; 41.626,11.812 43.378,11.812 ; 41.626,11.837 43.378,11.837 ; 41.626,11.863 43.353,11.863 ; 41.626,11.888 43.328,11.888 ; 41.626,11.913 43.328,11.913 ; 41.626,11.939 43.302,11.939 ; 41.626,11.964 43.302,11.964 ; 41.626,11.99 43.277,11.99 ; 41.626,12.015 43.277,12.015 ; 41.626,12.04 43.251,12.04 ; 41.626,12.066 43.226,12.066 ; 41.626,12.091 43.226,12.091 ; 41.626,12.117 43.201,12.117 ; 41.626,12.142 43.201,12.142 ; 41.626,12.167 43.175,12.167 ; 41.626,12.193 43.175,12.193 ; 41.626,12.218 43.15,12.218 ; 41.626,12.244 43.15,12.244 ; 41.626,12.269 43.124,12.269 ; 41.626,12.294 43.099,12.294 ; 41.626,12.32 43.099,12.32 ; 41.626,12.345 43.074,12.345 ; 41.626,12.371 43.074,12.371 ; 41.626,12.396 43.048,12.396 ; 41.626,12.421 43.023,12.421 ; 41.626,12.447 43.023,12.447 ; 41.626,12.472 42.997,12.472 ; 41.626,12.498 42.997,12.498 ; 41.626,12.523 42.972,12.523 ; 41.626,12.548 42.972,12.548 ; 41.626,12.574 42.947,12.574 ; 41.626,12.599 42.921,12.599 ; 41.626,12.625 42.921,12.625 ; 41.626,12.65 42.896,12.65 ; 41.626,12.675 42.896,12.675 ; 41.626,12.701 42.87,12.701 ; 41.626,12.726 42.845,12.726 ; 41.626,12.752 42.845,12.752 ; 41.626,12.777 42.82,12.777 ; 41.626,12.802 42.82,12.802 ; 41.626,12.828 42.794,12.828 ; 41.626,12.853 42.794,12.853 ; 41.626,12.879 42.769,12.879 ; 41.626,12.904 42.743,12.904 ; 41.626,12.929 42.743,12.929 ; 41.626,12.955 42.718,12.955 ; 41.626,12.98 42.718,12.98 ; 41.626,13.006 42.693,13.006 ; 41.626,13.031 42.693,13.031 ; 41.626,13.056 42.667,13.056 ; 41.626,13.082 42.667,13.082 ; 41.626,13.107 42.642,13.107 ; 41.626,13.133 42.616,13.133 ; 41.626,13.158 42.616,13.158 ; 41.626,13.183 42.591,13.183 ; 41.626,13.209 42.591,13.209 ; 41.626,13.234 42.566,13.234 ; 41.626,13.26 42.566,13.26 ; 41.626,13.285 42.54,13.285 ; 41.626,13.31 42.515,13.31 ; 41.626,13.336 42.515,13.336 ; 41.651,13.361 42.489,13.361 ; 41.651,13.387 42.489,13.387 ; 41.651,13.412 42.464,13.412 ; 41.651,13.437 42.439,13.437 ; 41.677,13.463 42.439,13.463 ; 41.677,13.488 42.413,13.488 ; 41.702,13.514 42.413,13.514 ; 41.702,13.539 42.388,13.539 ; 41.727,13.564 42.362,13.564 ; 41.753,13.59 42.337,13.59 ; 41.778,13.615 42.312,13.615 ; 41.829,13.641 42.286,13.641 ; 41.854,13.666 42.235,13.666 ; 41.931,13.691 42.185,13.691 ; 42.489,11.736 43.429,11.736 ; 42.489,11.761 43.404,11.761 ; 42.515,11.685 43.455,11.685 ; 42.515,11.71 43.429,11.71 ; 42.54,11.659 43.48,11.659 ; 42.566,11.609 43.505,11.609 ; 42.566,11.634 43.48,11.634 ; 42.591,11.558 43.531,11.558 ; 42.591,11.583 43.505,11.583 ; 42.616,11.507 43.556,11.507 ; 42.616,11.532 43.556,11.532 ; 42.642,11.456 43.582,11.456 ; 42.642,11.482 43.582,11.482 ; 42.667,11.431 43.607,11.431 ; 42.693,11.38 43.632,11.38 ; 42.693,11.405 43.632,11.405 ; 42.718,11.329 43.658,11.329 ; 42.718,11.355 43.658,11.355 ; 42.743,11.278 43.683,11.278 ; 42.743,11.304 43.683,11.304 ; 42.769,11.253 43.709,11.253 ; 42.794,11.202 43.734,11.202 ; 42.794,11.228 43.734,11.228 ; 42.82,11.151 43.759,11.151 ; 42.82,11.177 43.759,11.177 ; 42.845,11.101 43.785,11.101 ; 42.845,11.126 43.785,11.126 ; 42.87,11.075 43.81,11.075 ; 42.896,11.024 43.836,11.024 ; 42.896,11.05 43.836,11.05 ; 42.921,10.974 43.861,10.974 ; 42.921,10.999 43.861,10.999 ; 42.947,10.923 43.886,10.923 ; 42.947,10.948 43.886,10.948 ; 42.972,10.897 43.912,10.897 ; 42.997,10.847 43.937,10.847 ; 42.997,10.872 43.937,10.872 ; 43.023,10.796 43.963,10.796 ; 43.023,10.821 43.963,10.821 ; 43.048,10.745 43.988,10.745 ; 43.048,10.77 43.988,10.77 ; 43.074,10.72 44.013,10.72 ; 43.099,10.669 44.039,10.669 ; 43.099,10.694 44.039,10.694 ; 43.124,10.618 44.064,10.618 ; 43.124,10.643 44.064,10.643 ; 43.15,10.567 44.09,10.567 ; 43.15,10.593 44.09,10.593 ; 43.175,10.542 44.115,10.542 ; 43.201,10.491 44.14,10.491 ; 43.201,10.516 44.14,10.516 ; 43.226,10.44 45.08,10.44 ; 43.226,10.466 45.106,10.466 ; 43.251,10.389 45.055,10.389 ; 43.251,10.415 45.08,10.415 ; 43.277,10.364 45.055,10.364 ; 43.302,10.313 45.029,10.313 ; 43.302,10.339 45.029,10.339 ; 43.328,10.262 44.979,10.262 ; 43.328,10.288 45.004,10.288 ; 43.353,10.212 44.953,10.212 ; 43.353,10.237 44.979,10.237 ; 43.378,10.186 44.953,10.186 ; 43.404,10.135 44.928,10.135 ; 43.404,10.161 44.928,10.161 ; 43.429,10.085 44.877,10.085 ; 43.429,10.11 44.902,10.11 ; 43.455,10.034 44.852,10.034 ; 43.455,10.059 44.877,10.059 ; 43.48,10.008 44.852,10.008 ; 43.505,9.958 44.826,9.958 ; 43.505,9.983 44.826,9.983 ; 43.531,9.907 44.801,9.907 ; 43.531,9.932 44.801,9.932 ; 43.556,9.856 44.75,9.856 ; 43.556,9.881 44.775,9.881 ; 43.582,9.831 44.75,9.831 ; 43.607,9.78 44.725,9.78 ; 43.607,9.805 44.725,9.805 ; 43.632,9.729 44.699,9.729 ; 43.632,9.754 44.699,9.754 ; 43.658,9.678 44.648,9.678 ; 43.658,9.704 44.674,9.704 ; 43.683,9.653 44.648,9.653 ; 43.709,9.602 44.623,9.602 ; 43.709,9.627 44.623,9.627 ; 43.734,9.551 44.598,9.551 ; 43.734,9.577 44.598,9.577 ; 43.759,9.5 44.547,9.5 ; 43.759,9.526 44.572,9.526 ; 43.785,9.475 44.547,9.475 ; 43.81,9.424 44.521,9.424 ; 43.81,9.45 44.521,9.45 ; 43.836,9.373 44.471,9.373 ; 43.836,9.399 44.496,9.399 ; 43.886,9.348 44.445,9.348 ; 43.912,9.323 44.42,9.323 ; 43.937,9.297 44.394,9.297 ; 43.988,9.272 44.344,9.272 ; 44.09,9.246 44.242,9.246 ; 44.166,10.491 45.131,10.491 ; 44.191,10.516 45.131,10.516 ; 44.217,10.542 45.156,10.542 ; 44.217,10.567 45.156,10.567 ; 44.242,10.593 45.182,10.593 ; 44.242,10.618 45.182,10.618 ; 44.267,10.643 45.207,10.643 ; 44.267,10.669 45.233,10.669 ; 44.293,10.694 45.233,10.694 ; 44.318,10.72 45.258,10.72 ; 44.318,10.745 45.258,10.745 ; 44.344,10.77 45.283,10.77 ; 44.344,10.796 45.283,10.796 ; 44.369,10.821 45.309,10.821 ; 44.369,10.847 45.309,10.847 ; 44.394,10.872 45.334,10.872 ; 44.42,10.897 45.36,10.897 ; 44.42,10.923 45.36,10.923 ; 44.445,10.948 45.385,10.948 ; 44.445,10.974 45.385,10.974 ; 44.471,10.999 45.41,10.999 ; 44.471,11.024 45.41,11.024 ; 44.496,11.05 45.436,11.05 ; 44.496,11.075 45.461,11.075 ; 44.521,11.101 45.461,11.101 ; 44.547,11.126 45.487,11.126 ; 44.547,11.151 45.487,11.151 ; 44.572,11.177 45.512,11.177 ; 44.572,11.202 45.512,11.202 ; 44.598,11.228 45.537,11.228 ; 44.623,11.253 45.563,11.253 ; 44.623,11.278 45.563,11.278 ; 44.648,11.304 45.588,11.304 ; 44.648,11.329 45.588,11.329 ; 44.674,11.355 45.614,11.355 ; 44.674,11.38 45.614,11.38 ; 44.699,11.405 45.639,11.405 ; 44.725,11.431 45.664,11.431 ; 44.725,11.456 45.664,11.456 ; 44.75,11.482 45.69,11.482 ; 44.75,11.507 45.69,11.507 ; 44.775,11.532 45.715,11.532 ; 44.801,11.558 45.715,11.558 ; 44.801,11.583 45.741,11.583 ; 44.826,11.609 45.766,11.609 ; 44.826,11.634 45.766,11.634 ; 44.852,11.659 45.791,11.659 ; 44.852,11.685 45.791,11.685 ; 44.877,11.71 45.817,11.71 ; 44.902,11.736 45.817,11.736 ; 44.902,11.761 45.842,11.761 ; 44.928,11.786 46.68,11.786 ; 44.928,11.812 46.68,11.812 ; 44.953,11.837 46.68,11.837 ; 44.953,11.863 46.68,11.863 ; 44.979,11.888 46.68,11.888 ; 45.004,11.913 46.68,11.913 ; 45.004,11.939 46.68,11.939 ; 45.029,11.964 46.68,11.964 ; 45.029,11.99 46.68,11.99 ; 45.055,12.015 46.68,12.015 ; 45.055,12.04 46.68,12.04 ; 45.08,12.066 46.68,12.066 ; 45.08,12.091 46.68,12.091 ; 45.106,12.117 46.68,12.117 ; 45.131,12.142 46.68,12.142 ; 45.131,12.167 46.68,12.167 ; 45.156,12.193 46.68,12.193 ; 45.156,12.218 46.68,12.218 ; 45.182,12.244 46.68,12.244 ; 45.207,12.269 46.68,12.269 ; 45.207,12.294 46.68,12.294 ; 45.233,12.32 46.68,12.32 ; 45.233,12.345 46.68,12.345 ; 45.258,12.371 46.68,12.371 ; 45.283,12.396 46.68,12.396 ; 45.283,12.421 46.68,12.421 ; 45.309,12.447 46.68,12.447 ; 45.309,12.472 46.68,12.472 ; 45.334,12.498 46.68,12.498 ; 45.334,12.523 46.68,12.523 ; 45.36,12.548 46.68,12.548 ; 45.385,12.574 46.68,12.574 ; 45.385,12.599 46.68,12.599 ; 45.41,12.625 46.68,12.625 ; 45.41,12.65 46.68,12.65 ; 45.436,12.675 46.68,12.675 ; 45.436,12.701 46.68,12.701 ; 45.461,12.726 46.68,12.726 ; 45.461,12.752 46.68,12.752 ; 45.487,12.777 46.68,12.777 ; 45.512,12.802 46.68,12.802 ; 45.512,12.828 46.68,12.828 ; 45.537,12.853 46.68,12.853 ; 45.537,12.879 46.68,12.879 ; 45.563,12.904 46.68,12.904 ; 45.563,12.929 46.68,12.929 ; 45.588,12.955 46.68,12.955 ; 45.614,12.98 46.68,12.98 ; 45.614,13.006 46.68,13.006 ; 45.639,13.031 46.68,13.031 ; 45.639,13.056 46.68,13.056 ; 45.664,13.082 46.68,13.082 ; 45.69,13.107 46.68,13.107 ; 45.69,13.133 46.68,13.133 ; 45.715,13.158 46.68,13.158 ; 45.715,13.183 46.68,13.183 ; 45.741,13.209 46.68,13.209 ; 45.741,13.234 46.68,13.234 ; 45.766,13.26 46.68,13.26 ; 45.791,13.285 46.68,13.285 ; 45.791,13.31 46.68,13.31 ; 45.817,13.336 46.68,13.336 ; 45.817,13.361 46.68,13.361 ; 45.842,9.323 46.68,9.323 ; 45.842,9.348 46.68,9.348 ; 45.842,9.373 46.68,9.373 ; 45.842,9.399 46.68,9.399 ; 45.842,9.424 46.68,9.424 ; 45.842,9.45 46.68,9.45 ; 45.842,9.475 46.68,9.475 ; 45.842,9.5 46.68,9.5 ; 45.842,9.526 46.68,9.526 ; 45.842,9.551 46.68,9.551 ; 45.842,9.577 46.68,9.577 ; 45.842,9.602 46.68,9.602 ; 45.842,9.627 46.68,9.627 ; 45.842,9.653 46.68,9.653 ; 45.842,9.678 46.68,9.678 ; 45.842,9.704 46.68,9.704 ; 45.842,9.729 46.68,9.729 ; 45.842,9.754 46.68,9.754 ; 45.842,9.78 46.68,9.78 ; 45.842,9.805 46.68,9.805 ; 45.842,9.831 46.68,9.831 ; 45.842,9.856 46.68,9.856 ; 45.842,9.881 46.68,9.881 ; 45.842,9.907 46.68,9.907 ; 45.842,9.932 46.68,9.932 ; 45.842,9.958 46.68,9.958 ; 45.842,9.983 46.68,9.983 ; 45.842,10.008 46.68,10.008 ; 45.842,10.034 46.68,10.034 ; 45.842,10.059 46.68,10.059 ; 45.842,10.085 46.68,10.085 ; 45.842,10.11 46.68,10.11 ; 45.842,10.135 46.68,10.135 ; 45.842,10.161 46.68,10.161 ; 45.842,10.186 46.68,10.186 ; 45.842,10.212 46.68,10.212 ; 45.842,10.237 46.68,10.237 ; 45.842,10.262 46.68,10.262 ; 45.842,10.288 46.68,10.288 ; 45.842,10.313 46.68,10.313 ; 45.842,10.339 46.68,10.339 ; 45.842,10.364 46.68,10.364 ; 45.842,10.389 46.68,10.389 ; 45.842,10.415 46.68,10.415 ; 45.842,10.44 46.68,10.44 ; 45.842,10.466 46.68,10.466 ; 45.842,10.491 46.68,10.491 ; 45.842,10.516 46.68,10.516 ; 45.842,10.542 46.68,10.542 ; 45.842,10.567 46.68,10.567 ; 45.842,10.593 46.68,10.593 ; 45.842,10.618 46.68,10.618 ; 45.842,10.643 46.68,10.643 ; 45.842,10.669 46.68,10.669 ; 45.842,10.694 46.68,10.694 ; 45.842,10.72 46.68,10.72 ; 45.842,10.745 46.68,10.745 ; 45.842,10.77 46.68,10.77 ; 45.842,10.796 46.68,10.796 ; 45.842,10.821 46.68,10.821 ; 45.842,10.847 46.68,10.847 ; 45.842,10.872 46.68,10.872 ; 45.842,10.897 46.68,10.897 ; 45.842,10.923 46.68,10.923 ; 45.842,10.948 46.68,10.948 ; 45.842,10.974 46.68,10.974 ; 45.842,10.999 46.68,10.999 ; 45.842,11.024 46.68,11.024 ; 45.842,11.05 46.68,11.05 ; 45.842,11.075 46.68,11.075 ; 45.842,11.101 46.68,11.101 ; 45.842,11.126 46.68,11.126 ; 45.842,11.151 46.68,11.151 ; 45.842,11.177 46.68,11.177 ; 45.842,11.202 46.68,11.202 ; 45.842,11.228 46.68,11.228 ; 45.842,11.253 46.68,11.253 ; 45.842,11.278 46.68,11.278 ; 45.842,11.304 46.68,11.304 ; 45.842,11.329 46.68,11.329 ; 45.842,11.355 46.68,11.355 ; 45.842,11.38 46.68,11.38 ; 45.842,11.405 46.68,11.405 ; 45.842,11.431 46.68,11.431 ; 45.842,11.456 46.68,11.456 ; 45.842,11.482 46.68,11.482 ; 45.842,11.507 46.68,11.507 ; 45.842,11.532 46.68,11.532 ; 45.842,11.558 46.68,11.558 ; 45.842,11.583 46.68,11.583 ; 45.842,11.609 46.68,11.609 ; 45.842,11.634 46.68,11.634 ; 45.842,11.659 46.68,11.659 ; 45.842,11.685 46.68,11.685 ; 45.842,11.71 46.68,11.71 ; 45.842,11.736 46.68,11.736 ; 45.842,13.387 46.68,13.387 ; 45.842,13.412 46.68,13.412 ; 45.868,11.761 46.68,11.761 ; 45.868,13.437 46.68,13.437 ; 45.893,13.463 46.655,13.463 ; 45.893,13.488 46.655,13.488 ; 45.918,13.514 46.63,13.514 ; 45.918,13.539 46.604,13.539 ; 45.944,13.564 46.604,13.564 ; 45.969,13.59 46.579,13.59 ; 46.02,13.615 46.553,13.615 ; 46.045,13.641 46.503,13.641 ; 46.096,13.666 46.477,13.666 ; 46.147,13.691 46.401,13.691 ; 46.909,10.237 47.798,10.237 ; 46.909,10.262 47.773,10.262 ; 46.909,10.288 47.773,10.288 ; 46.909,10.313 47.747,10.313 ; 46.909,10.339 47.747,10.339 ; 46.909,10.364 47.747,10.364 ; 46.909,10.389 47.747,10.389 ; 46.909,10.415 47.747,10.415 ; 46.909,10.44 47.747,10.44 ; 46.909,10.466 47.747,10.466 ; 46.909,10.491 47.747,10.491 ; 46.909,10.516 47.747,10.516 ; 46.909,10.542 47.747,10.542 ; 46.909,10.567 47.747,10.567 ; 46.909,10.593 47.747,10.593 ; 46.909,10.618 47.747,10.618 ; 46.909,10.643 47.747,10.643 ; 46.909,10.669 47.747,10.669 ; 46.909,10.694 47.747,10.694 ; 46.909,10.72 47.747,10.72 ; 46.909,10.745 47.747,10.745 ; 46.909,10.77 47.747,10.77 ; 46.909,10.796 47.747,10.796 ; 46.909,10.821 47.747,10.821 ; 46.909,10.847 47.747,10.847 ; 46.909,10.872 47.747,10.872 ; 46.909,10.897 47.747,10.897 ; 46.909,10.923 47.747,10.923 ; 46.909,10.948 47.747,10.948 ; 46.909,10.974 47.747,10.974 ; 46.909,10.999 47.747,10.999 ; 46.909,11.024 47.747,11.024 ; 46.909,11.05 47.747,11.05 ; 46.909,11.075 47.747,11.075 ; 46.909,11.101 47.747,11.101 ; 46.909,11.126 47.747,11.126 ; 46.909,11.151 47.747,11.151 ; 46.909,11.177 47.747,11.177 ; 46.909,11.202 47.747,11.202 ; 46.909,11.228 47.747,11.228 ; 46.909,11.253 47.747,11.253 ; 46.909,11.278 47.747,11.278 ; 46.909,11.304 47.747,11.304 ; 46.909,11.329 47.747,11.329 ; 46.909,11.355 47.747,11.355 ; 46.909,11.38 47.747,11.38 ; 46.909,11.405 47.747,11.405 ; 46.909,11.431 47.747,11.431 ; 46.909,11.456 47.747,11.456 ; 46.909,11.482 47.747,11.482 ; 46.909,11.507 47.747,11.507 ; 46.909,11.532 47.747,11.532 ; 46.909,11.558 47.747,11.558 ; 46.909,11.583 47.747,11.583 ; 46.909,11.609 47.747,11.609 ; 46.909,11.634 47.747,11.634 ; 46.909,11.659 47.747,11.659 ; 46.909,11.685 47.747,11.685 ; 46.909,11.71 47.747,11.71 ; 46.909,11.736 47.747,11.736 ; 46.909,11.761 47.747,11.761 ; 46.909,11.786 47.747,11.786 ; 46.909,11.812 47.747,11.812 ; 46.909,11.837 47.747,11.837 ; 46.909,11.863 47.747,11.863 ; 46.909,11.888 47.747,11.888 ; 46.909,11.913 47.747,11.913 ; 46.909,11.939 47.747,11.939 ; 46.909,11.964 47.747,11.964 ; 46.909,11.99 47.747,11.99 ; 46.909,12.015 47.747,12.015 ; 46.909,12.04 47.747,12.04 ; 46.909,12.066 47.747,12.066 ; 46.909,12.091 47.747,12.091 ; 46.909,12.117 47.747,12.117 ; 46.909,12.142 47.747,12.142 ; 46.909,12.167 47.747,12.167 ; 46.909,12.193 47.747,12.193 ; 46.909,12.218 47.747,12.218 ; 46.909,12.244 47.747,12.244 ; 46.909,12.269 47.747,12.269 ; 46.909,12.294 47.747,12.294 ; 46.909,12.32 47.747,12.32 ; 46.909,12.345 47.747,12.345 ; 46.909,12.371 47.747,12.371 ; 46.909,12.396 47.747,12.396 ; 46.909,12.421 47.747,12.421 ; 46.909,12.447 47.747,12.447 ; 46.909,12.472 47.747,12.472 ; 46.909,12.498 47.747,12.498 ; 46.909,12.523 47.747,12.523 ; 46.909,12.548 47.747,12.548 ; 46.909,12.574 47.747,12.574 ; 46.909,12.599 47.747,12.599 ; 46.909,12.625 47.747,12.625 ; 46.909,12.65 47.747,12.65 ; 46.909,12.675 47.747,12.675 ; 46.909,12.701 47.747,12.701 ; 46.909,12.726 47.747,12.726 ; 46.909,12.752 47.747,12.752 ; 46.909,12.777 47.747,12.777 ; 46.909,12.802 47.747,12.802 ; 46.909,12.828 50.871,12.828 ; 46.909,12.853 50.871,12.853 ; 46.909,12.879 50.871,12.879 ; 46.909,12.904 50.871,12.904 ; 46.909,12.929 50.871,12.929 ; 46.909,12.955 50.871,12.955 ; 46.909,12.98 50.871,12.98 ; 46.909,13.006 50.871,13.006 ; 46.909,13.031 50.871,13.031 ; 46.909,13.056 50.871,13.056 ; 46.909,13.082 50.871,13.082 ; 46.909,13.107 50.871,13.107 ; 46.909,13.133 50.871,13.133 ; 46.909,13.158 50.871,13.158 ; 46.909,13.183 50.871,13.183 ; 46.909,13.209 50.871,13.209 ; 46.909,13.234 50.871,13.234 ; 46.909,13.26 50.871,13.26 ; 46.909,13.285 50.871,13.285 ; 46.909,13.31 50.871,13.31 ; 46.909,13.336 50.871,13.336 ; 46.934,10.11 50.871,10.11 ; 46.934,10.135 47.976,10.135 ; 46.934,10.161 47.874,10.161 ; 46.934,10.186 47.849,10.186 ; 46.934,10.212 47.823,10.212 ; 46.934,13.361 50.871,13.361 ; 46.934,13.387 50.871,13.387 ; 46.96,10.008 50.871,10.008 ; 46.96,10.034 50.871,10.034 ; 46.96,10.059 50.871,10.059 ; 46.96,10.085 50.871,10.085 ; 46.96,13.412 50.871,13.412 ; 46.96,13.437 50.871,13.437 ; 46.985,9.958 50.871,9.958 ; 46.985,9.983 50.871,9.983 ; 46.985,13.463 50.871,13.463 ; 46.985,13.488 50.871,13.488 ; 47.011,9.907 50.871,9.907 ; 47.011,9.932 50.871,9.932 ; 47.011,13.514 50.871,13.514 ; 47.036,9.856 50.871,9.856 ; 47.036,9.881 50.871,9.881 ; 47.061,9.805 50.871,9.805 ; 47.061,9.831 50.871,9.831 ; 47.061,13.539 50.871,13.539 ; 47.087,9.78 50.871,9.78 ; 47.087,13.564 50.871,13.564 ; 47.112,9.729 50.871,9.729 ; 47.112,9.754 50.871,9.754 ; 47.112,13.59 50.871,13.59 ; 47.138,9.704 50.871,9.704 ; 47.163,9.678 50.871,9.678 ; 47.163,13.615 50.871,13.615 ; 47.188,9.653 50.871,9.653 ; 47.214,9.627 50.871,9.627 ; 47.239,9.602 50.871,9.602 ; 47.239,13.641 50.871,13.641 ; 47.265,9.577 50.871,9.577 ; 47.315,9.551 50.871,9.551 ; 47.341,9.526 50.871,9.526 ; 47.366,9.5 50.871,9.5 ; 47.417,9.475 50.871,9.475 ; 47.468,9.45 50.871,9.45 ; 47.519,9.424 50.871,9.424 ; 47.569,9.399 50.871,9.399 ; 47.62,9.373 50.871,9.373 ; 47.696,9.348 50.871,9.348 ; 47.823,9.323 50.871,9.323 ; 48.001,11.075 50.516,11.075 ; 48.001,11.101 50.516,11.101 ; 48.001,11.126 50.516,11.126 ; 48.001,11.151 50.516,11.151 ; 48.001,11.177 50.516,11.177 ; 48.001,11.202 50.516,11.202 ; 48.001,11.228 50.516,11.228 ; 48.001,11.253 50.516,11.253 ; 48.001,11.278 50.516,11.278 ; 48.001,11.304 50.516,11.304 ; 48.001,11.329 50.516,11.329 ; 48.001,11.355 50.516,11.355 ; 48.001,11.38 50.516,11.38 ; 48.001,11.405 50.516,11.405 ; 48.001,11.431 50.516,11.431 ; 48.001,11.456 50.516,11.456 ; 48.001,11.482 50.516,11.482 ; 48.001,11.507 50.516,11.507
  Top Layer w0.025: 48.001,11.532 50.516,11.532 ; 48.001,11.558 50.516,11.558 ; 48.001,11.583 50.516,11.583 ; 48.001,11.609 50.516,11.609 ; 48.001,11.634 50.516,11.634 ; 48.001,11.659 50.516,11.659 ; 48.001,11.685 50.516,11.685 ; 48.001,11.71 50.516,11.71 ; 48.001,11.736 50.516,11.736 ; 48.001,11.761 50.516,11.761 ; 48.001,11.786 50.516,11.786 ; 48.001,11.812 50.516,11.812 ; 48.001,11.837 50.516,11.837 ; 48.001,11.863 50.516,11.863 ; 48.027,11.888 50.516,11.888

## Polygon pours and split planes (outlines as drawn)
GND on Top Layer "GND_L01_P004" (solid, remove dead copper, pour order 4): 65.9,37 48.5,37 45,33.5 28.6,33.5 28.6,25.8 32.2,22.2 65.9,22.2